# EAGLE board driver_board_v2 (EAGLE 6.5.0)
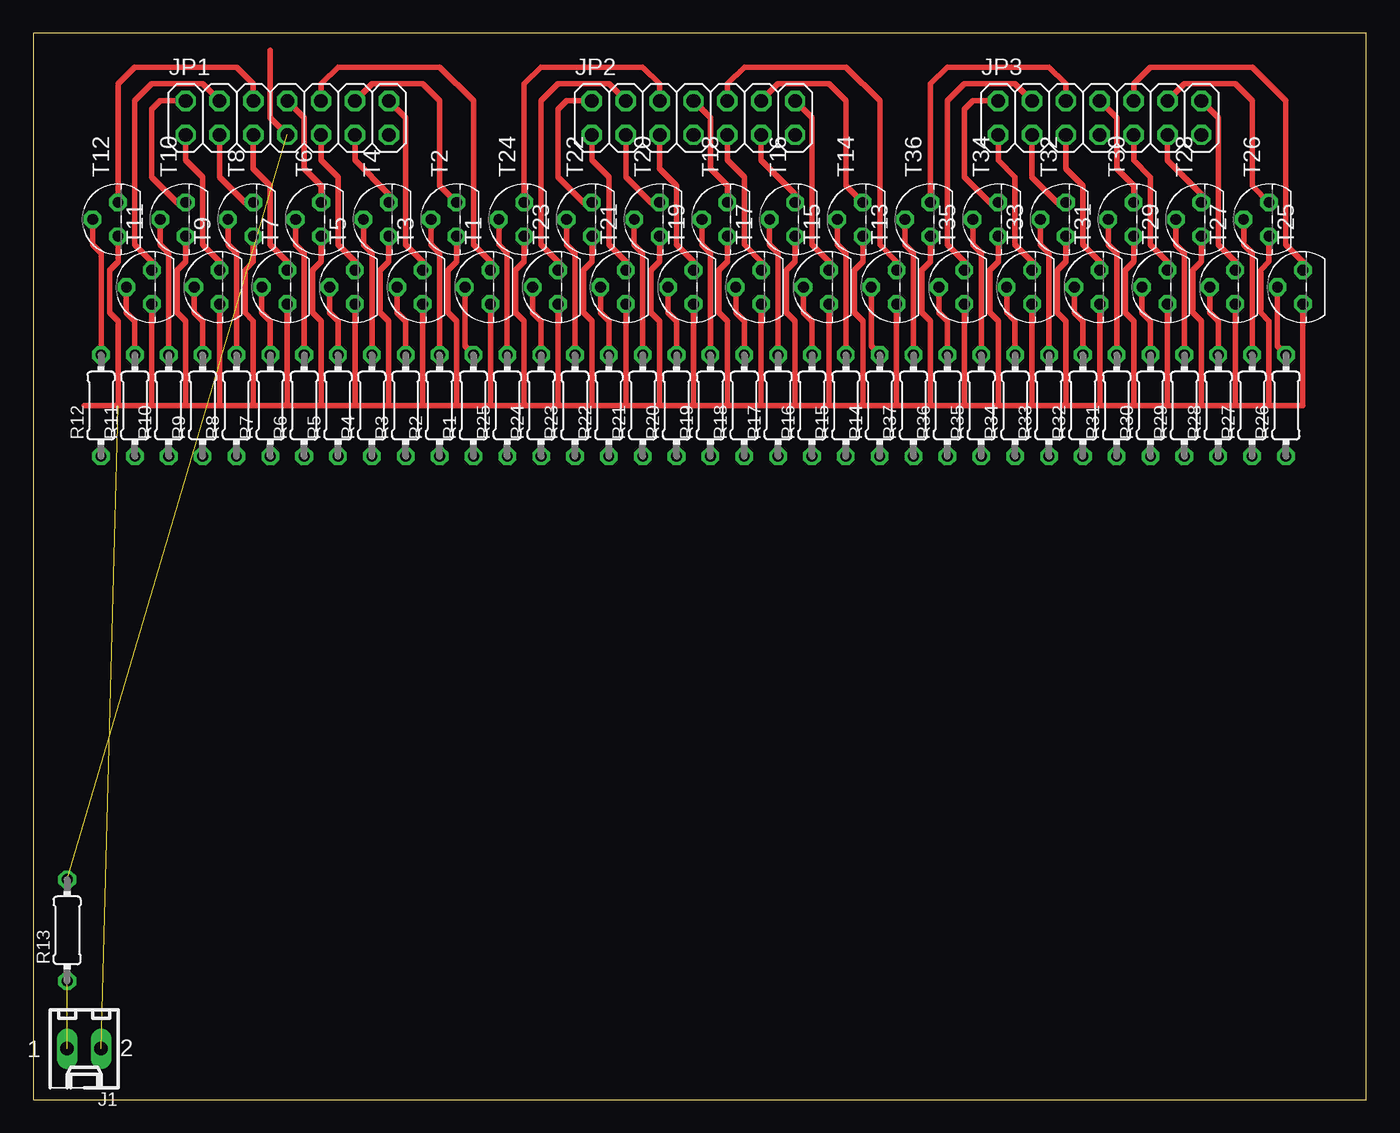
[diagram p0: board, top side]

Size 100 x 80 mm. Coordinates in mm from the lower left corner, seen from the top.
Outline: 0,0 100,0 100,80 0,80 0,0
Copper layers (1*16): Top 0.035mm / dielectric 1.5mm / Bottom 0.035mm
Design rules "default": minimum track width 10mil, minimum drill 24mil, track to track 8mil, track to pad 8mil, pad to pad 8mil, via to via 8mil, smd to smd 8mil, copper to edge 40mil, drill to drill 8mil, minimum pad ring 10mil, minimum via ring 8mil, stop-mask expansion 4mil, vias tented up to drill 0mil, thermal gap 10mil

## Footprints (pad centres in the part's own frame; a part is rotated, then mirrored left to right if it is on the bottom)
6410-02 = drill 1.016 long: 1 1.27,0; 2 -1.27,0
2X07 = drill 1.016 octagon: 1 -7.62,-1.27; 2 -7.62,1.27; 3 -5.08,-1.27; 4 -5.08,1.27; 5 -2.54,-1.27; 6 -2.54,1.27; 7 0,-1.27; 8 0,1.27; 9 2.54,-1.27; 10 2.54,1.27; 11 5.08,-1.27; 12 5.08,1.27; 13 7.62,-1.27; 14 7.62,1.27
0204/7 = drill 0.813 octagon: 1 -3.81,0; 2 3.81,0
TO92 = drill 0.813 octagon: 1 1.27,0; 2 0,1.905; 3 -1.27,0

## Placement (x,y rotation side)
J1  22-27-2021-02  [6410-02]  3.81,3.81 180 top
JP1  [2X07]  19.05,73.66 0 top
JP2  [2X07]  49.53,73.66 0 top
JP3  [2X07]  80.01,73.66 0 top
R1  [0204/7]  33.02,52.07 90 top
R2  [0204/7]  30.48,52.07 90 top
R3  [0204/7]  27.94,52.07 90 top
R4  [0204/7]  25.4,52.07 90 top
R5  [0204/7]  22.86,52.07 90 top
R6  [0204/7]  20.32,52.07 90 top
R7  [0204/7]  17.78,52.07 90 top
R8  [0204/7]  15.24,52.07 90 top
R9  [0204/7]  12.7,52.07 90 top
R10  [0204/7]  10.16,52.07 90 top
R11  [0204/7]  7.62,52.07 90 top
R12  [0204/7]  5.08,52.07 90 top
R13  [0204/7]  2.54,12.7 90 top
R14  [0204/7]  63.5,52.07 90 top
R15  [0204/7]  60.96,52.07 90 top
R16  [0204/7]  58.42,52.07 90 top
R17  [0204/7]  55.88,52.07 90 top
R18  [0204/7]  53.34,52.07 90 top
R19  [0204/7]  50.8,52.07 90 top
R20  [0204/7]  48.26,52.07 90 top
R21  [0204/7]  45.72,52.07 90 top
R22  [0204/7]  43.18,52.07 90 top
R23  [0204/7]  40.64,52.07 90 top
R24  [0204/7]  38.1,52.07 90 top
R25  [0204/7]  35.56,52.07 90 top
R26  [0204/7]  93.98,52.07 90 top
R27  [0204/7]  91.44,52.07 90 top
R28  [0204/7]  88.9,52.07 90 top
R29  [0204/7]  86.36,52.07 90 top
R30  [0204/7]  83.82,52.07 90 top
R31  [0204/7]  81.28,52.07 90 top
R32  [0204/7]  78.74,52.07 90 top
R33  [0204/7]  76.2,52.07 90 top
R34  [0204/7]  73.66,52.07 90 top
R35  [0204/7]  71.12,52.07 90 top
R36  [0204/7]  68.58,52.07 90 top
R37  [0204/7]  66.04,52.07 90 top
T1  2N3565  [TO92]  34.29,60.96 90 top
T2  2N3565  [TO92]  31.75,66.04 90 top
T3  2N3565  [TO92]  29.21,60.96 90 top
T4  2N3565  [TO92]  26.67,66.04 90 top
T5  2N3565  [TO92]  24.13,60.96 90 top
T6  2N3565  [TO92]  21.59,66.04 90 top
T7  2N3565  [TO92]  19.05,60.96 90 top
T8  2N3565  [TO92]  16.51,66.04 90 top
T9  2N3565  [TO92]  13.97,60.96 90 top
T10  2N3565  [TO92]  11.43,66.04 90 top
T11  2N3565  [TO92]  8.89,60.96 90 top
T12  2N3565  [TO92]  6.35,66.04 90 top
T13  2N3565  [TO92]  64.77,60.96 90 top
T14  2N3565  [TO92]  62.23,66.04 90 top
T15  2N3565  [TO92]  59.69,60.96 90 top
T16  2N3565  [TO92]  57.15,66.04 90 top
T17  2N3565  [TO92]  54.61,60.96 90 top
T18  2N3565  [TO92]  52.07,66.04 90 top
T19  2N3565  [TO92]  49.53,60.96 90 top
T20  2N3565  [TO92]  46.99,66.04 90 top
T21  2N3565  [TO92]  44.45,60.96 90 top
T22  2N3565  [TO92]  41.91,66.04 90 top
T23  2N3565  [TO92]  39.37,60.96 90 top
T24  2N3565  [TO92]  36.83,66.04 90 top
T25  2N3565  [TO92]  95.25,60.96 90 top
T26  2N3565  [TO92]  92.71,66.04 90 top
T27  2N3565  [TO92]  90.17,60.96 90 top
T28  2N3565  [TO92]  87.63,66.04 90 top
T29  2N3565  [TO92]  85.09,60.96 90 top
T30  2N3565  [TO92]  82.55,66.04 90 top
T31  2N3565  [TO92]  80.01,60.96 90 top
T32  2N3565  [TO92]  77.47,66.04 90 top
T33  2N3565  [TO92]  74.93,60.96 90 top
T34  2N3565  [TO92]  72.39,66.04 90 top
T35  2N3565  [TO92]  69.85,60.96 90 top
T36  2N3565  [TO92]  67.31,66.04 90 top

## Library data of the parts
J1 = con-molex; OC_FARNELL: unknown; OC_NEWARK: unknown
JP1-JP3 = pinhead
R1-R37 = resistor
T1-T36 = transistor

## Nets
A: JP1.7 R13.2
A1: JP2.7
A2: JP3.7
GND: J1.2 T1.3 T2.3 T3.3 T4.3 T5.3 T6.3 T7.3 T8.3 T9.3 T10.3 T11.3 T12.3 T13.3 T14.3 T15.3 T16.3 T17.3 T18.3 T19.3 T20.3 T21.3 T22.3 T23.3 T24.3 T25.3 T26.3 T27.3 T28.3 T29.3 T30.3 T31.3 T32.3 T33.3 T34.3 T35.3 T36.3
N$1: R12.2 T12.2
N$2: R11.2 T11.2
N$3: R10.2 T10.2
N$4: R9.2 T9.2
N$5: R8.2 T8.2
N$6: R7.2 T7.2
N$7: R6.2 T6.2
N$8: R5.2 T5.2
N$9: R4.2 T4.2
N$10: R3.2 T3.2
N$11: R2.2 T2.2
N$12: R1.2 T1.2
N$13: JP1.6 T12.1
N$14: JP1.4 T11.1
N$15: JP1.2 T10.1
N$16: JP1.1 T9.1
N$17: JP1.3 T8.1
N$18: JP1.5 T7.1
N$19: JP1.10 T1.1
N$20: JP1.12 T2.1
N$21: JP1.14 T3.1
N$22: JP1.8 T6.1
N$23: JP1.9 T5.1
N$24: JP1.11 T4.1
N$25: J1.1 R13.1
N$26: R25.2 T24.2
N$27: R24.2 T23.2
N$28: R23.2 T22.2
N$29: R22.2 T21.2
N$30: R21.2 T20.2
N$31: R20.2 T19.2
N$32: R19.2 T18.2
N$33: R18.2 T17.2
N$34: R17.2 T16.2
N$35: R16.2 T15.2
N$36: R15.2 T14.2
N$37: R14.2 T13.2
N$38: JP2.6 T24.1
N$39: JP2.4 T23.1
N$40: JP2.2 T22.1
N$41: JP2.1 T21.1
N$42: JP2.3 T20.1
N$43: JP2.5 T19.1
N$44: JP2.10 T13.1
N$45: JP2.12 T14.1
N$46: JP2.14 T15.1
N$47: JP2.8 T18.1
N$48: JP2.9 T17.1
N$49: JP2.11 T16.1
N$50: R37.2 T36.2
N$51: R36.2 T35.2
N$52: R35.2 T34.2
N$53: R34.2 T33.2
N$54: R33.2 T32.2
N$55: R32.2 T31.2
N$56: R31.2 T30.2
N$57: R30.2 T29.2
N$58: R29.2 T28.2
N$59: R28.2 T27.2
N$60: R27.2 T26.2
N$61: R26.2 T25.2
N$62: JP3.6 T36.1
N$63: JP3.4 T35.1
N$64: JP3.2 T34.1
N$65: JP3.1 T33.1
N$66: JP3.3 T32.1
N$67: JP3.5 T31.1
N$68: JP3.10 T25.1
N$69: JP3.12 T26.1
N$70: JP3.14 T27.1
N$71: JP3.8 T30.1
N$72: JP3.9 T29.1
N$73: JP3.11 T28.1

## Tracks (layer width: path | path; a pad name or v marks a point on that pad's centre or on a via)
A  (1 unrouted)
  Top 0.406: JP1.7 17.78,73.66 17.78,78.74
GND  (1 unrouted)
  Top 0.406: T11.3 8.89,52.07 | 8.89,52.07 11.43,52.07 | 11.43,52.07 13.97,52.07 | 13.97,52.07 T9.3 | T10.3 11.43,62.87 10.79,62.23 10.79,59.05 11.43,58.42 11.43,52.07 | T12.3 6.35,62.87 5.71,62.23 5.71,59.05 6.35,58.42 6.35,52.07 | 6.35,52.07 8.89,52.07 | T8.3 16.51,62.87 15.88,62.23 15.88,59.05 16.51,58.42 16.51,52.07 | 16.51,52.07 19.05,52.07 | 19.05,52.07 T7.3 | T5.3 24.13,52.07 | 24.13,52.07 21.59,52.07 | 21.59,52.07 19.05,52.07 | T3.3 29.21,52.07 | 29.21,52.07 26.67,52.07 | 26.67,52.07 24.13,52.07 | 16.51,52.07 13.97,52.07 | 34.29,52.07 31.75,52.07 | 31.75,52.07 29.21,52.07 | T2.3 31.75,62.87 31.11,62.23 31.11,59.05 31.75,58.42 31.75,52.07 | T4.3 26.67,62.87 26.04,62.23 26.04,59.05 26.67,58.42 26.67,52.07 | T6.3 21.59,62.87 20.95,62.23 20.95,59.05 21.59,58.42 21.59,52.07 | T23.3 39.37,52.07 | 39.37,52.07 41.91,52.07 | 41.91,52.07 44.45,52.07 | 44.45,52.07 T21.3 | T22.3 41.91,62.87 41.27,62.23 41.27,59.05 41.91,58.42 41.91,52.07 | T24.3 36.83,62.87 36.2,62.23 36.2,59.05 36.83,58.42 36.83,52.07 | 36.83,52.07 39.37,52.07 | T20.3 46.99,62.87 46.35,62.23 46.35,59.05 46.99,58.42 46.99,52.07 | 46.99,52.07 49.53,52.07 | 49.53,52.07 T19.3 | T17.3 54.61,52.07 | 54.61,52.07 52.07,52.07 | 52.07,52.07 49.53,52.07 | T15.3 59.69,52.07 | 59.69,52.07 57.15,52.07 | 57.15,52.07 54.61,52.07 | 46.99,52.07 44.45,52.07 | 64.77,52.07 62.23,52.07 | 62.23,52.07 59.69,52.07 | T14.3 62.23,62.87 61.59,62.23 61.59,59.05 62.23,58.42 62.23,52.07 | T16.3 57.15,62.87 56.52,62.23 56.52,59.05 57.15,58.42 57.15,52.07 | T18.3 52.07,62.87 51.44,62.23 51.44,59.05 52.07,58.42 52.07,52.07 | T35.3 69.85,52.07 | 69.85,52.07 72.39,52.07 | 72.39,52.07 74.93,52.07 | 74.93,52.07 T33.3
  Top 0.406: T34.3 72.39,62.87 71.75,62.23 71.75,59.05 72.39,58.42 72.39,52.07 | T36.3 67.31,62.87 66.67,62.23 66.67,59.05 67.31,58.42 67.31,52.07 | 67.31,52.07 69.85,52.07 | T32.3 77.47,62.87 76.83,62.23 76.83,59.05 77.47,58.42 77.47,52.07 | 77.47,52.07 80.01,52.07 | 80.01,52.07 T31.3 | T29.3 85.09,52.07 | 85.09,52.07 82.55,52.07 | 82.55,52.07 80.01,52.07 | T27.3 90.17,52.07 | 90.17,52.07 87.63,52.07 | 87.63,52.07 85.09,52.07 | 77.47,52.07 74.93,52.07 | T25.3 95.25,52.07 92.71,52.07 | 92.71,52.07 90.17,52.07 | T26.3 92.71,62.87 92.08,62.23 92.08,59.05 92.71,58.42 92.71,52.07 | T28.3 87.63,62.87 87,62.23 87,59.05 87.63,58.42 87.63,52.07 | T30.3 82.55,62.87 81.92,62.23 81.92,59.05 82.55,58.42 82.55,52.07 | T13.3 64.77,52.07 | 64.77,52.07 67.31,52.07 | T1.3 34.29,52.07 | 34.29,52.07 36.83,52.07 | 6.35,52.07 3.81,52.07
N$1
  Top 0.406: T12.2 4.45,64.14 5.08,63.5 R12.2
N$2
  Top 0.406: T11.2 6.99,59.05 7.62,58.42 R11.2
N$3
  Top 0.406: T10.2 9.53,64.14 10.16,63.5 R10.2
N$4
  Top 0.406: T9.2 12.06,59.05 12.7,58.42 R9.2
N$5
  Top 0.406: R8.2 15.24,63.5 14.61,64.14 T8.2
N$6
  Top 0.406: R7.2 17.78,58.42 17.14,59.05 T7.2
N$7
  Top 0.406: R6.2 20.32,63.5 19.68,64.14 T6.2
N$8
  Top 0.406: R5.2 22.86,58.42 22.23,59.05 T5.2
N$9
  Top 0.406: R4.2 25.4,63.5 24.77,64.14 T4.2
N$10
  Top 0.406: R3.2 27.94,58.42 27.3,59.05 T3.2
N$11
  Top 0.406: R2.2 30.48,63.5 29.84,64.14 T2.2
N$12
  Top 0.406: R1.2 32.38,56.52 T1.2
N$13
  Top 0.406: T12.1 6.35,76.2 7.62,77.47 15.24,77.47 16.51,76.2 JP1.6
N$14
  Top 0.406: JP1.4 12.7,76.2 8.89,76.2 7.62,74.93 7.62,64.14 8.89,62.87 T11.1
N$15
  Top 0.406: JP1.2 9.53,74.93 8.89,74.3 8.89,69.22 10.79,67.31 T10.1
N$16
  Top 0.406: JP1.1 11.43,70.48 12.7,69.22 12.7,64.14 13.97,62.87 T9.1
N$17
  Top 0.406: JP1.3 13.97,69.22 15.88,67.31 T8.1
N$18
  Top 0.406: JP1.5 16.51,69.85 17.78,68.58 17.78,64.14 19.05,62.87 T7.1
N$19
  Top 0.406: JP1.10 21.59,76.2 22.86,77.47 30.48,77.47 33.02,74.93 33.02,64.14 34.29,62.87 T1.1
N$20
  Top 0.406: JP1.12 25.4,76.2 29.21,76.2 30.48,74.93 30.48,68.58 T2.1
N$21
  Top 0.406: T3.1 29.21,62.87 27.94,64.14 27.94,73.66 JP1.14
N$22
  Top 0.406: T6.1 21.59,68.58 20.32,69.85 20.32,73.66 JP1.8
N$23
  Top 0.406: JP1.9 21.59,70.48 22.86,69.22 22.86,64.14 24.13,62.87 T5.1
N$24
  Top 0.406: JP1.11 24.13,70.48 26.67,67.94 T4.1
N$25  (1 unrouted)
N$26
  Top 0.406: T24.2 34.92,64.14 35.56,63.5 R25.2
N$27
  Top 0.406: T23.2 37.47,59.05 38.1,58.42 R24.2
N$28
  Top 0.406: T22.2 40.01,64.14 40.64,63.5 R23.2
N$29
  Top 0.406: T21.2 42.55,59.05 43.18,58.42 R22.2
N$30
  Top 0.406: R21.2 45.72,63.5 45.09,64.14 T20.2
N$31
  Top 0.406: R20.2 48.26,58.42 47.62,59.05 T19.2
N$32
  Top 0.406: R19.2 50.8,63.5 50.16,64.14 T18.2
N$33
  Top 0.406: R18.2 53.34,58.42 52.7,59.05 T17.2
N$34
  Top 0.406: R17.2 55.88,63.5 55.24,64.14 T16.2
N$35
  Top 0.406: R16.2 58.42,58.42 57.78,59.05 T15.2
N$36
  Top 0.406: R15.2 60.96,63.5 60.33,64.14 T14.2
N$37
  Top 0.406: R14.2 62.87,56.52 T13.2
N$38
  Top 0.406: T24.1 36.83,76.2 38.1,77.47 45.72,77.47 46.99,76.2 JP2.6
N$39
  Top 0.406: JP2.4 43.18,76.2 39.37,76.2 38.1,74.93 38.1,64.14 39.37,62.87 T23.1
N$40
  Top 0.406: JP2.2 40.01,74.93 39.37,74.3 39.37,69.22 41.27,67.31 T22.1
N$41
  Top 0.406: JP2.1 41.91,70.48 43.18,69.22 43.18,64.14 44.45,62.87 T21.1
N$42
  Top 0.406: JP2.3 44.45,69.22 46.35,67.31 T20.1
N$43
  Top 0.406: JP2.5 46.99,69.85 48.26,68.58 48.26,64.14 49.53,62.87 T19.1
N$44
  Top 0.406: JP2.10 52.07,76.2 53.34,77.47 60.96,77.47 63.5,74.93 63.5,64.14 64.77,62.87 T13.1
N$45
  Top 0.406: JP2.12 55.88,76.2 59.69,76.2 60.96,74.93 60.96,68.58 T14.1
N$46
  Top 0.406: T15.1 59.69,62.87 58.42,64.14 58.42,73.66 JP2.14
N$47
  Top 0.406: T18.1 52.07,68.58 50.8,69.85 50.8,73.66 JP2.8
N$48
  Top 0.406: JP2.9 52.07,70.48 53.34,69.22 53.34,64.14 54.61,62.87 T17.1
N$49
  Top 0.406: JP2.11 54.61,70.48 57.15,67.94 T16.1
N$50
  Top 0.406: T36.2 65.41,64.14 66.04,63.5 R37.2
N$51
  Top 0.406: T35.2 67.94,59.05 68.58,58.42 R36.2
N$52
  Top 0.406: T34.2 70.48,64.14 71.12,63.5 R35.2
N$53
  Top 0.406: T33.2 73.03,59.05 73.66,58.42 R34.2
N$54
  Top 0.406: R33.2 76.2,63.5 75.56,64.14 T32.2
N$55
  Top 0.406: R32.2 78.74,58.42 78.11,59.05 T31.2
N$56
  Top 0.406: R31.2 81.28,63.5 80.64,64.14 T30.2
N$57
  Top 0.406: R30.2 83.82,58.42 83.19,59.05 T29.2
N$58
  Top 0.406: R29.2 86.36,63.5 85.72,64.14 T28.2
N$59
  Top 0.406: R28.2 88.9,58.42 88.27,59.05 T27.2
N$60
  Top 0.406: R27.2 91.44,63.5 90.81,64.14 T26.2
N$61
  Top 0.406: R26.2 93.34,56.52 T25.2
N$62
  Top 0.406: T36.1 67.31,76.2 68.58,77.47 76.2,77.47 77.47,76.2 JP3.6
N$63
  Top 0.406: JP3.4 73.66,76.2 69.85,76.2 68.58,74.93 68.58,64.14 69.85,62.87 T35.1
N$64
  Top 0.406: JP3.2 70.48,74.93 69.85,74.3 69.85,69.22 71.75,67.31 T34.1
N$65
  Top 0.406: JP3.1 72.39,70.48 73.66,69.22 73.66,64.14 74.93,62.87 T33.1
N$66
  Top 0.406: JP3.3 74.93,69.22 76.83,67.31 T32.1
N$67
  Top 0.406: JP3.5 77.47,69.85 78.74,68.58 78.74,64.14 80.01,62.87 T31.1
N$68
  Top 0.406: JP3.10 82.55,76.2 83.82,77.47 91.44,77.47 93.98,74.93 93.98,64.14 95.25,62.87 T25.1
N$69
  Top 0.406: JP3.12 86.36,76.2 90.17,76.2 91.44,74.93 91.44,68.58 T26.1
N$70
  Top 0.406: JP3.14 88.9,73.66 88.9,64.14 90.17,62.87 T27.1
N$71
  Top 0.406: T30.1 82.55,68.58 81.28,69.85 81.28,73.66 JP3.8
N$72
  Top 0.406: JP3.9 82.55,70.48 83.82,69.22 83.82,64.14 85.09,62.87 T29.1
N$73
  Top 0.406: JP3.11 85.09,70.48 87.63,67.94 T28.1